# Altium PCB LS1C300B_176A_Msystem.PcbDoc (part 1 of 3)
Units mm, origin at the board's own origin, x right, y up, seen from the top; angles counter-clockwise.
Board outline 100.25 x 70.25 mm, 2 copper layers (Top Layer, Bottom Layer); 139 components, 183 nets, 683 pads, 164 vias.
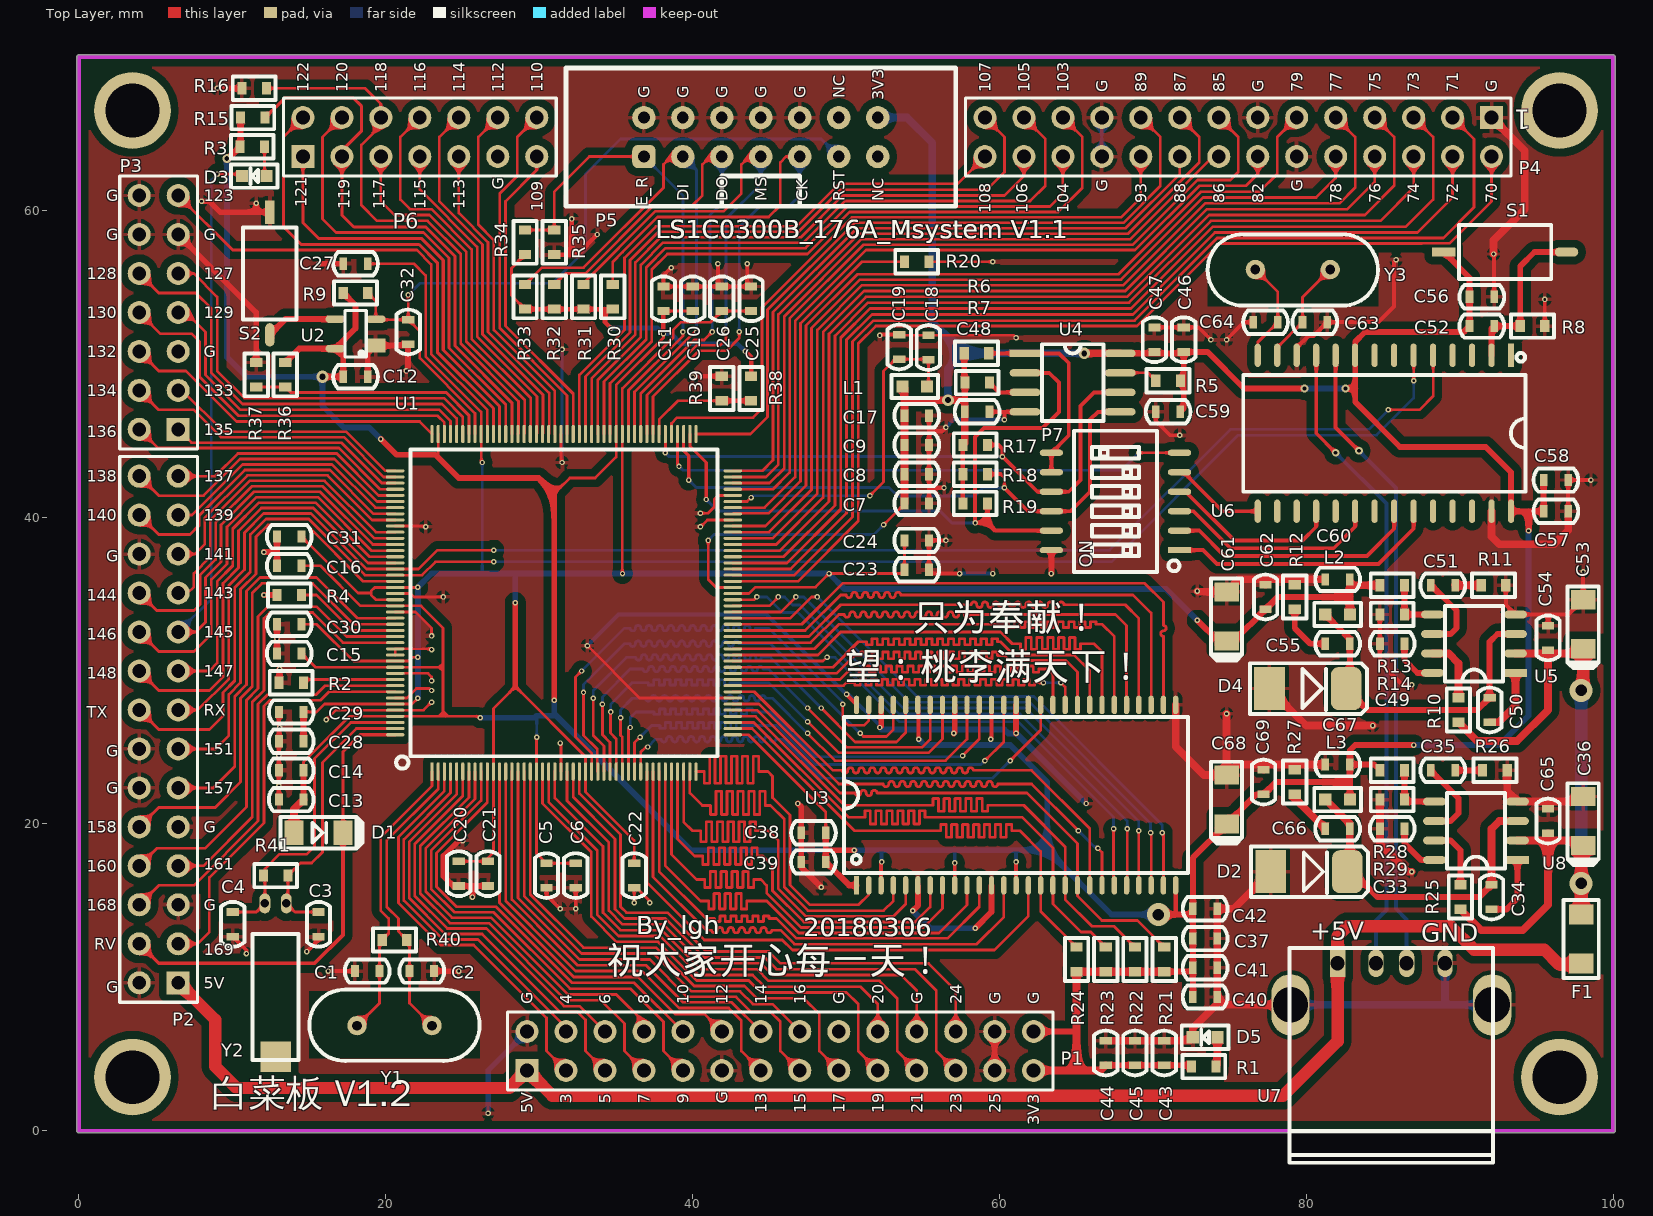
[diagram p0: Top Layer view]
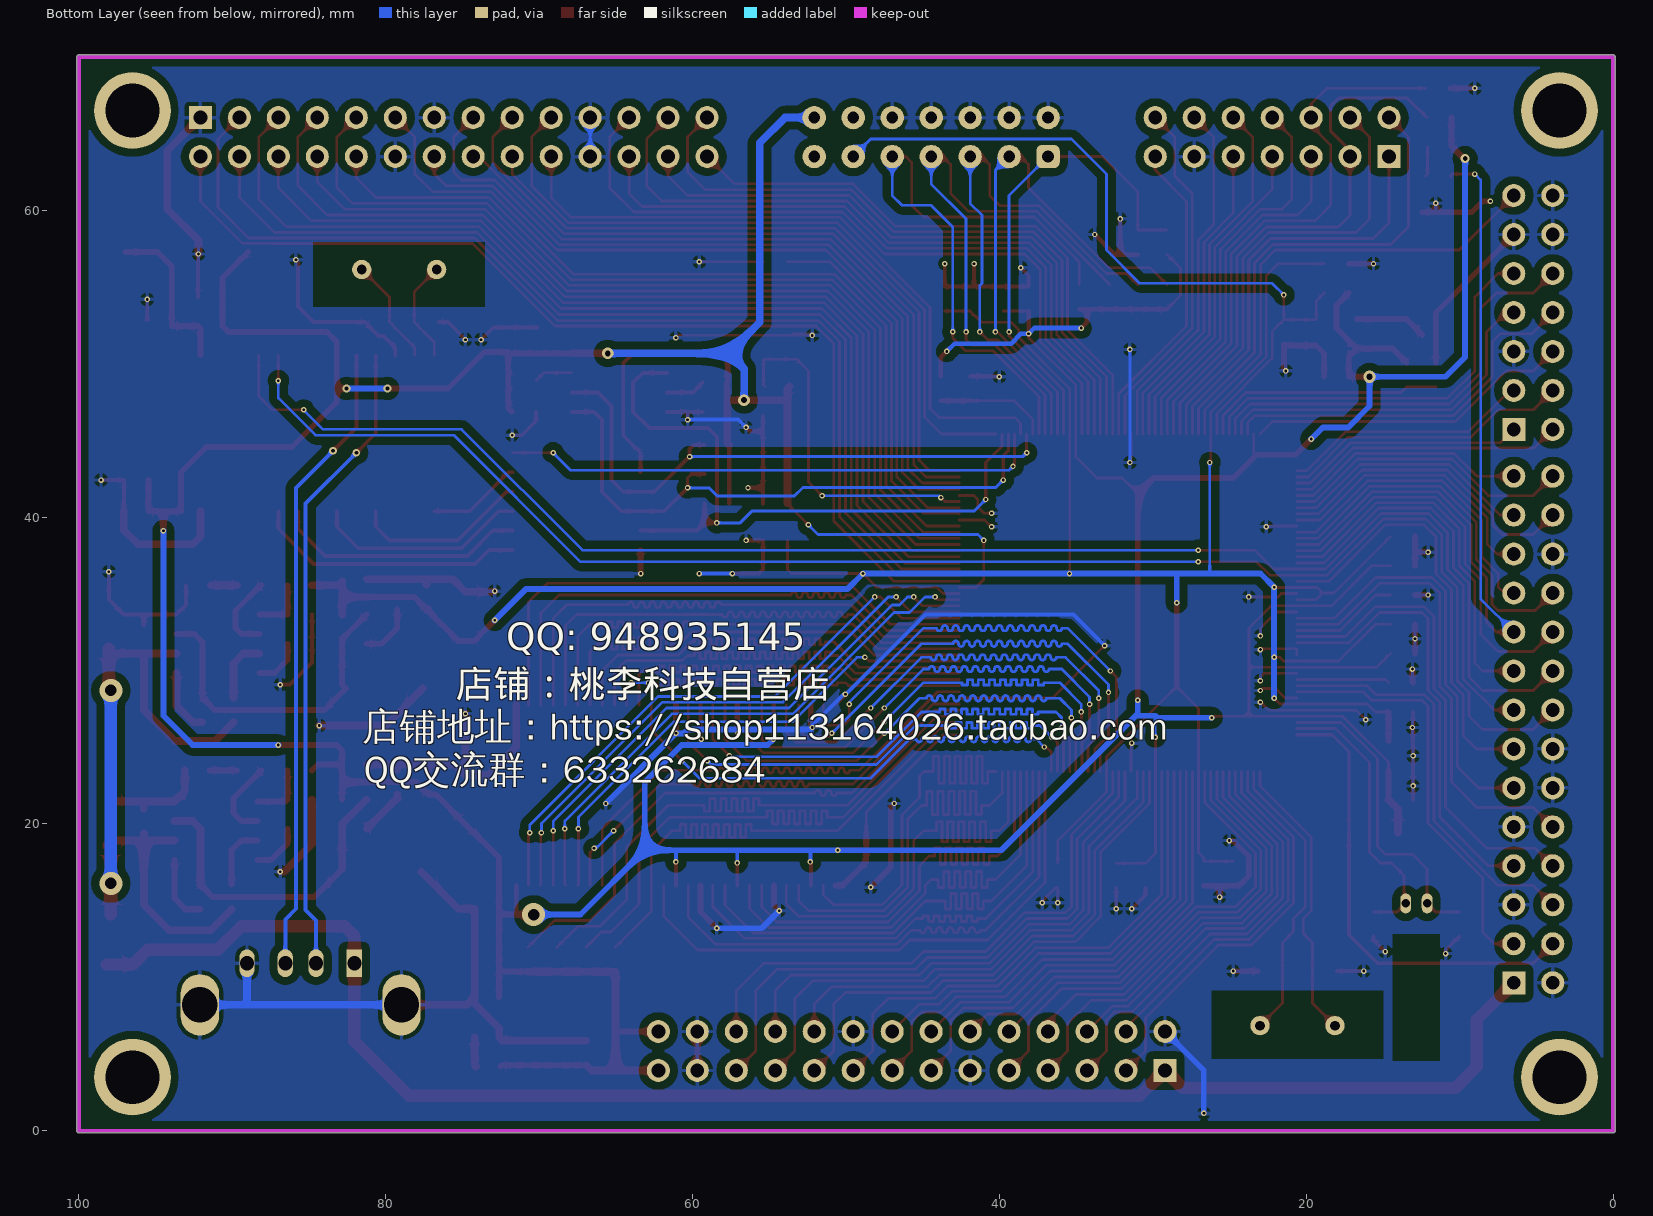
[diagram p1: Bottom Layer view, seen from below]

## Layer stack, top to bottom
Top Solder: solder mask 0.0102, Solder Resist, Dk 3.5
Top Layer: signal copper 0.0356
Dielectric 1: dielectric 0.32, FR-4, Dk 4.8
Bottom Layer: signal copper 0.0356
Bottom Solder: solder mask 0.0102, Solder Resist, Dk 3.5

## Board outline
-0.127,0 -0.127,69.85 cw(c0,69.85) -0.103,69.925 cw(c0,70) 0,70.127 100,70.127 cw(c100,70) 100.127,70 100.127,0 cw(c100,0) 100,-0.127 0,-0.127 cw(c0,0)

## Design rules (kind name [scope] priority, off if disabled: settings)
Clearance [All] p1: gap=0.508 ignorepadtopadclearanceinfootprint=FALSE except(0: Arc-Hole Track-Hole SMDPad-Hole THPad-Hole Via-Hole Fill-Hole Poly-Hole Region-Hole Text-Hole; 0.178: Arc-Arc Arc-Track Arc-SMDPad Track-Track Track-SMDPad SMDPad-SMDPad; 0.254: Arc-THPad Arc-Via Arc-Text Track-THPad Track-Via Track-Text SMDPad-THPad SMDPad-Via SMDPad-Text THPad-THPad THPad-Via THPad-Text Via-Via Via-Text Fill-Text Poly-Text Region-Text Text-Text)
HoleSize [All] p1: absolutevalues=TRUE maxlimit=3.81 minlimit=0.025 maxpercent=80.000 minpercent=20.000
Length [All] p1: maxlimit=2540 minlimit=0
Length SDRAM [All] p2: maxlimit=36.83 minlimit=34.29
MinimumSolderMaskSliver [All] p1: minsoldermaskwidth=0
PolygonConnect [All] p1: connectstyle=Relief reliefconductorwidth=0.254 reliefentries=4 polygonreliefangle="90 Angle" airgapwidth=0.254
RoutingVias [All] p1: holewidth=0.178 width=0.356 viastyle="Through Hole" minholewidth=0.178 minwidth=0.356 maxholewidth=0.711 maxwidth=1.27
SilkToSilkClearance [All] p1: silktosilkclearance=0
SilkToSolderMaskClearance [IsPad] p1: minsilkscreentomaskgap=0 clearancetoexposedcopper=TRUE
SolderMaskExpansion [All] p1: expansion=0.102
Width [All] p1: maxlimit=1.06 minlimit=0.152 preferedwidth=0.203
26 further rules are at their usual default settings.

## Components (designator, comment, footprint, x,y, rotation, side; value= is the part's Value field where it differs from the comment)
C1 "贴片电容" C0603 18.796,10.414 r0 top value=22pF
C2 "贴片电容" C0603 22.352,10.414 r180 top value=22pF
C3 "贴片电容" C0603 15.621,13.462 r90 top value=22pF
C4 "贴片电容" C0603 10.033,13.462 r90 top value=22pF
C5 "贴片电容" C0603 30.48,16.637 r90 top value=106
C6 "贴片电容" C0603 32.385,16.637 r90 top value=104
C7 "贴片电容" C0603 54.61,40.894 r180 top value=106
C8 "贴片电容" C0603 54.61,42.799 r180 top value=104
C9 "贴片电容" C0603 54.61,44.704 r180 top value=104
C10 "贴片电容" C0603 40.005,54.229 r270 top value=106
C11 "贴片电容" C0603 38.1,54.229 r270 top value=104
C12 "贴片电容" C0603 18.034,49.149 r180 top value=104
C13 "贴片电容" C0603 13.843,21.59 r0 top value=106
C14 "贴片电容" C0603 13.843,23.495 r0 top value=104
C15 "贴片电容" C0603 13.716,31.115 r0 top value=104
C16 "贴片电容" C0603 13.716,36.83 r0 top value=104
C17 "贴片电容" C0603 54.61,46.609 r180 top value=104
C18 "贴片电容" C0603 55.372,51.054 r270 top value=104
C19 "贴片电容" C0603 53.467,51.092 r270 top value=106
C20 "贴片电容" C0603 24.765,16.764 r90 top value=106
C21 "贴片电容" C0603 26.67,16.764 r90 top value=104
C22 "贴片电容" C0603 36.195,16.637 r90 top value=104
C23 "贴片电容" C0603 54.61,36.576 r180 top value=106
C24 "贴片电容" C0603 54.61,38.481 r180 top value=104
C25 "贴片电容" C0603 43.815,54.229 r270 top value=106
C26 "贴片电容" C0603 41.91,54.229 r270 top value=104
C27 "贴片电容" C0603 18.034,56.515 r0 top value=104
C28 "贴片电容" C0603 13.843,25.4 r0 top value=106
C29 "贴片电容" C0603 13.843,27.305 r0 top value=104
C30 "贴片电容" C0603 13.716,33.02 r0 top value=104
C31 "贴片电容" C0603 13.716,38.735 r0 top value=104
C32 "贴片电容" C0603 21.463,52.07 r90 top value=104
C33 "贴片电容" C0603 85.598,19.685 r180 top value=104
C34 "贴片电容" C0603 92.075,15.24 r90 top value=103
C35 "贴片电容" C0603 88.9,23.495 r180 top value="3.9nF 5%"
C36 "贴片钽电容" P-C1206 98.044,20.193 r90 top value=10uF/16V
C37 "贴片电容" C0603 73.406,12.535 r180 top value=106
C38 "贴片电容" C0603 47.879,19.431 r0 top value=104
C39 "贴片电容" C0603 47.879,17.526 r0 top value=104
C40 "贴片电容" C0603 73.406,8.725 r180 top value=104
C41 "贴片电容" C0603 73.406,10.63 r180 top value=104
C42 "贴片电容" C0603 73.406,14.478 r180 top value=104
C43 "贴片电容" C0603 70.739,5.08 r270 top value=104
C44 "贴片电容" C0603 66.929,5.08 r270 top value=104
C45 "贴片电容" C0603 68.834,5.08 r270 top value=104
C46 "贴片电容" C0603 72.009,51.562 r270 top value=106
C47 "贴片电容" C0603 70.104,51.562 r270 top value=104
C48 "贴片电容" C0603 58.547,46.863 r180 top value=104
C49 "贴片电容" C0603 85.598,31.75 r180 top value=104
C50 "贴片电容" C0603 91.948,27.432 r90 top value=103
C51 "贴片电容" C0603 88.9,35.56 r180 top value="3.9nF 5%"
C52 "贴片电容" C0603 91.44,52.451 r180 top value=104
C53 "贴片钽电容" P-C1206 98.044,33.02 r90 top value=10uF/16V
C54 "贴片电容" C0603 95.758,32.131 r270 top value=104
C55 "贴片电容" C0603 82.042,31.75 r0 top value=103
C56 "贴片电容" C0603 91.44,54.356 r180 top value=104
C57 "贴片电容" C0603 96.266,40.386 r180 top value=106
C58 "贴片电容" C0603 96.266,42.418 r180 top value=104
C59 "贴片电容" C0603 70.993,46.863 r0 top value=104
C60 "贴片电容" C0603 82.042,35.941 r180 top value=104
C61 "贴片钽电容" P-C1206 74.803,33.528 r90 top value=22uF/10V
C62 "贴片电容" C0603 77.343,34.798 r270 top value=104
C63 "贴片电容" C0603 80.556,52.705 r180 top value=22pF
C64 "贴片电容" C0603 77.343,52.705 r0 top value=22pF
C65 "贴片电容" C0603 95.758,20.193 r270 top value=104
C66 "贴片电容" C0603 82.042,19.685 r0 top value=103
C67 "贴片电容" C0603 82.042,23.876 r180 top value=104
C68 "贴片钽电容" P-C1206 74.803,21.59 r90 top value=22uF/10V
C69 "贴片电容" C0603 77.216,22.733 r270 top value=104
D1 "贴片二极管" LL-34 15.621,19.431 r0 top value=1NA4148
D2 "贴片二极管" DO-214AC 77.677,16.891 r0 top value=SS24
D3 "LED灯" LED-0603 11.43,62.23 r180 top value="绿色LED 0603"
D4 "贴片二极管" DO-214AC 77.597,28.829 r0 top value=SS24
D5 "LED灯" LED-0603 73.406,6.096 r180 top value="绿色LED 0603"
F1 "贴片保险丝" R1206 97.917,12.497 r270 top value=3A/5A
L1 "贴片电感" L0603 54.483,48.514 r0 top value=10uH
L2 "贴片电感" L0603 82.042,33.655 r180 top value=10uH
L3 "贴片电感" L0603 82.042,21.59 r180 top value=10uH
P1 "双排直针插针" HDR2X14 29.21,3.937 r0 top value=2*14P/2.54mm
P2 "双排直针插针" HDR2X14 6.477,9.652 r90 top value=2*14P/2.54mm
P3 "双排直针插针" HDR2X7 6.477,45.72 r90 top value=2*7P/2.54mm
P4 "双排直针插针" HDR2X14 92.075,66.04 r180 top value=2*14P/2.54mm
P5 "EJTAG接口14P" DC3-14P 44.45,64.77 r0 top value=DC3-14P/2*7p/2.54mm
P6 "双排直针插针" HDR2X7 14.605,63.5 r0 top value=2*7P/2.54mm
P7 "6P 拨动开关" DSHP06 67.564,41.021 r90 top value=DSHP06TSGET
R1 "贴片电阻" R0603 73.317,4.191 r180 top value="10K 1%"
R2 "贴片电阻" R0603 13.843,29.21 r0 top value="44.2R 1%"
R3 "贴片电阻" R0603 11.303,64.135 r180 top value="10K 1%"
R4 "贴片电阻" R0603 13.716,34.925 r0 top value="44.2R 1%"
R5 "贴片电阻" R0603 70.993,48.895 r180 top value="10K 1%"
R6 "贴片电阻" R0603 58.509,50.673 r0 top value="10K 1%"
R7 "贴片电阻" R0603 58.547,48.768 r0 top value="10K 1%"
R8 "贴片电阻" R0603 94.742,52.451 r0 top value="10K 1%"
R9 "贴片电阻" R0603 18.034,54.61 r180 top value="100K 5%"
R10 "贴片电阻" R0603 89.916,27.432 r90 top value="100K 5%"
R11 "贴片电阻" R0603 92.202,35.56 r180 top value="6.8K 1%"
R12 "贴片电阻" R0603 79.248,34.798 r90 top value="44.2K 1%"
R13 "贴片电阻" R0603 85.598,35.56 r180 top value="3.0K 1%"
R14 "贴片电阻" R0603 85.598,33.655 r0 top value="10K 1%"
R15 "贴片电阻" R0603 11.341,66.04 r0 top value="10K 1%"
R16 "贴片电阻" R0603 11.43,67.945 r0 top value="10K 1%"
R17 "贴片电阻" R0603 58.42,44.704 r180 top value="10K 1%"
R18 "贴片电阻" R0603 58.42,42.799 r180 top value="10K 1%"
R19 "贴片电阻" R0603 58.42,40.894 r180 top value="10K 1%"
R20 "贴片电阻" R0603 54.61,56.642 r180 top value="10K 1%"
R21 "贴片电阻" R0603 70.739,11.176 r90 top value="10K 1%"
R22 "贴片电阻" R0603 68.834,11.176 r90 top value="10K 1%"
R23 "贴片电阻" R0603 66.929,11.176 r90 top value="10K 1%"
R24 "贴片电阻" R0603 65.024,11.176 r90 top value="10K 1%"
R25 "贴片电阻" R0603 90.043,15.24 r90 top value="100K 5%"
R26 "贴片电阻" R0603 92.291,23.495 r180 top value="6.8K 1%"
R27 "贴片电阻" R0603 79.248,22.733 r90 top value="44.2K 1%"
R28 "贴片电阻" R0603 85.598,23.495 r180 top value="26.1K 1%"
R29 "贴片电阻" R0603 85.598,21.59 r0 top value="10K 1%"
R30 "贴片电阻" R0603 34.798,54.356 r270 top value="10K 1%"
R31 "贴片电阻" R0603 32.893,54.356 r270 top value="10K 1%"
R32 "贴片电阻" R0603 30.988,54.356 r270 top value="10K 1%"
R33 "贴片电阻" R0603 29.083,54.356 r270 top value="10K 1%"
R34 "贴片电阻" R0603 29.083,57.912 r270 top value="10K 1%"
R35 "贴片电阻" R0603 30.988,57.912 r270 top value="10K 1%"
R36 "贴片电阻" R0603 13.462,49.276 r90 top value="10K 1%"
R37 "贴片电阻" R0603 11.557,49.276 r90 top value="10K 1%"
R38 "贴片电阻" R0603 43.815,48.387 r90 top value="10K 1%"
R39 "贴片电阻" R0603 41.91,48.387 r90 top value="10K 1%"
R40 "贴片电阻" R0603 20.574,12.446 r180 top value="1M 5%"
R41 "贴片电阻" R0603 12.827,16.637 r0 top value="1M 5%"
S1 "贴片轻触按钮" "Touch button" 92.964,57.277 r0 top value=3.5*6*2.5mm
S2 "贴片轻触按钮" "Touch button" 12.446,55.88 r270 top value=3.5*6*2.5mm
U1 "LS1C300B_176A" QFP176 31.623,34.417 r0 top
U2 "复位延时芯片" SOT-143 18.034,51.943 r90 top value=MAX811
U3 "SDRAM" TSOP54 61.086,21.882 r0 top value=V54C3256164VHI6/IS42S16400-7T
U4 "NOR FLASH" SOIC-8-N 64.77,48.768 r270 top value=W25Q80
U5 "电源稳压芯片" SOIC-8 90.932,31.75 r90 top value=MP1482DS
U6 "通信芯片" SOP28 85.09,45.466 r180 top value=CH341A
U7 "USB座子" "USB-TYPE A" 85.542,10.922 r0 top value="USB-type A座子"
U8 "电源稳压芯片" SOIC-8 91.059,19.558 r90 top value=MP1482DS
Y1 "直插晶振" HC-49S 20.574,6.858 r0 top value=24MHz
Y2 "直插晶振" TC-38 12.827,14.826 r90 top value=32.768KHz
Y3 "直插晶振" HC-49S 79.121,56.134 r180 top value=12MHz

## Footprints (in the part's own frame and the unit in brackets; to place one, negate y for a bottom-side part, rotate by r counter-clockwise, add the part's x,y. Pads: shape width x height; smd on the part's side, far side on the other; paste and mask are expansions set on the pad)
C0603 [mm] "长1.6mm，宽0.8mm，高0.5mm"
  rect 0.5x0.8 smd: 1(-0.8,0) 2(0.8,0)
  silkscreen extent -1.46,-0.76 1.46,0.76, body extent -0.76,-0.38 0.76,0.38, height 0.5
DC3-14P [mil]
  rrect50% 60x60 hole 30: 1(-300,-50)
  round 60 hole 30: 2(-200,-50) 3(-100,-50) 4(0,-50) 5(100,-50) 6(200,-50) 7(300,-50) 8(300,50) 9(200,50) 10(100,50) 11(0,50) 12(-100,50) 13(-200,50) 14(-300,50)
  silkscreen extent -500,-177 500,177, body extent -500,-175 500,175, height 354
DO-214AC [mm] "长5.2mm，宽2.9mm，高2.4mm"
  rect 2x2.8 smd: 1(0,0)
  rrect50% 2x2.8 smd: 2(5,0)
  silkscreen extent -1.27,-1.65 6.35,1.65, body extent -0.13,-1.4 5.14,1.4, height 2.41
DSHP06 [mm] "BODY  9.22*5.4mm  引脚 9.22*8.35mm，脚间距1.27mm"
  rect 0.4x1.524 smd: 1(-3.175,-4.175)
  oval 0.4x1.524 smd: 2(-1.905,-4.175) 3(-0.635,-4.175) 4(0.635,-4.175) 5(1.905,-4.175) 6(3.175,-4.175) 7(3.175,4.175) 8(1.905,4.175) 9(0.635,4.175) 10(-0.635,4.175) 11(-1.905,4.175) 12(-3.175,4.175)
  silkscreen extent -4.61,-4.17 4.61,2.7, body extent -4.57,-2.67 4.57,2.67, height 2.3
HC-49S [mm] "高壳体积为10.5*4.5*3.5mm 矮壳体积10.5*5*.0*2.5mm"
  round 1.26 hole 0.63: 1(-2.44,0) 2(2.44,0)
  silkscreen extent -5.55,-2.3 5.55,2.35, body extent -5.6,-2.3 5.6,2.43, height 3.5
HDR2X7 [mm] "Connector; Header; 7x2 Position"
  rect 1.5x1.5 hole 0.9: 1(0,0)
  round 1.5 hole 0.9: 2(0,2.54) 3(2.54,0) 4(2.54,2.54) 5(5.08,0) 6(5.08,2.54) 7(7.62,0) 8(7.62,2.54) 9(10.16,0) 10(10.16,2.54) 11(12.7,0) 12(12.7,2.54) 13(15.24,0) 14(15.24,2.54)
  silkscreen extent -1.27,-1.27 16.51,3.81
HDR2X14 [mm] "Connector; Header; 14x2 Position"
  rect 1.5x1.5 hole 0.9: 1(0,0)
  round 1.5 hole 0.9: 2(0,2.54) 3(2.54,0) 4(2.54,2.54) 5(5.08,0) 6(5.08,2.54) 7(7.62,0) 8(7.62,2.54) 9(10.16,0) 10(10.16,2.54) 11(12.7,0) 12(12.7,2.54) 13(15.24,0) 14(15.24,2.54) 15(17.78,0) 16(17.78,2.54) 17(20.32,0) 18(20.32,2.54) 19(22.86,0) 20(22.86,2.54) 21(25.4,0) 22(25.4,2.54) 23(27.94,0) 24(27.94,2.54) 25(30.48,0) 26(30.48,2.54) 27(33.02,0) 28(33.02,2.54)
  silkscreen extent -1.27,-1.27 34.29,3.81
L0603 [mm] "长1.6mm，宽0.8mm，高0.5mm"
  rect 0.8x0.8 smd: 1(-0.8,0) 2(0.8,0)
  silkscreen extent -1.52,-0.76 1.52,0.76, body extent -0.76,-0.38 0.76,0.38, height 0.5
LED-0603 [mm] "长1.6mm，宽0.8mm，高0.5mm"
  rect 0.8x0.8 smd: 1(-0.8,0) 2(0.8,0)
  silkscreen extent -1.52,-0.76 1.52,0.76, body extent -0.76,-0.38 0.76,0.38, height 0.5
LL-34 [mm] "长3.4mm，宽1.35mm，高1.35mm"
  rect 1.25x1.6 smd: 1(-1.6,0) 2(1.6,0)
  silkscreen extent -2.46,-1.02 2.87,1.02, body extent -1.65,-0.7 1.65,0.7, height 1.39
P-C1206 [mm] "长3.2mm，宽1.6mm，高1.6mm"
  rect 1.25x1.6 smd: 1(-1.6,0) 2(1.6,0)
  silkscreen extent -2.87,-1.02 2.46,1.02, body extent -1.65,-0.76 1.65,0.76, height 2
QFP176 [mm] "body长宽20mm，引脚长宽22mm,脚间距0.4mm"
  rect 0.2x1.2 smd: 1(-8.6,-11)
  oval 0.2x1.2 smd: 2(-8.2,-11) 3(-7.8,-11) 4(-7.4,-11) 5(-7,-11) 6(-6.6,-11) 7(-6.2,-11) 8(-5.8,-11) 9(-5.4,-11) 10(-5,-11) 11(-4.6,-11) 12(-4.2,-11) 13(-3.8,-11) 14(-3.4,-11) 15(-3,-11) 16(-2.6,-11) 17(-2.2,-11) 18(-1.8,-11) 19(-1.4,-11) 20(-1,-11) 21(-0.6,-11) 22(-0.2,-11) 23(0.2,-11) 24(0.6,-11) 25(1,-11) 26(1.4,-11) 27(1.8,-11) 28(2.2,-11) 29(2.6,-11) 30(3,-11) 31(3.4,-11) 32(3.8,-11) 33(4.2,-11) 34(4.6,-11) 35(5,-11) 36(5.4,-11) 37(5.8,-11) 38(6.2,-11) 39(6.6,-11) 40(7,-11) 41(7.4,-11) 42(7.8,-11) 43(8.2,-11) 44(8.6,-11) 89(8.6,11) 90(8.2,11) 91(7.8,11) 92(7.4,11) 93(7,11) 94(6.6,11) 95(6.2,11) 96(5.8,11) 97(5.4,11) 98(5,11) 99(4.6,11) 100(4.2,11) 101(3.8,11) 102(3.4,11) 103(3,11) 104(2.6,11) 105(2.2,11) 106(1.8,11) 107(1.4,11) 108(1,11) 109(0.6,11) 110(0.2,11) 111(-0.2,11) 112(-0.6,11) 113(-1,11) 114(-1.4,11) 115(-1.8,11) 116(-2.2,11) 117(-2.6,11) 118(-3,11) 119(-3.4,11) 120(-3.8,11) 121(-4.2,11) 122(-4.6,11) 123(-5,11) 124(-5.4,11) 125(-5.8,11) 126(-6.2,11) 127(-6.6,11) 128(-7,11) 129(-7.4,11) 130(-7.8,11) 131(-8.2,11) 132(-8.6,11)
  oval 1.2x0.2 smd: 45(11,-8.6) 46(11,-8.2) 47(11,-7.8) 48(11,-7.4) 49(11,-7) 50(11,-6.6) 51(11,-6.2) 52(11,-5.8) 53(11,-5.4) 54(11,-5) 55(11,-4.6) 56(11,-4.2) 57(11,-3.8) 58(11,-3.4) 59(11,-3) 60(11,-2.6) 61(11,-2.2) 62(11,-1.8) 63(11,-1.4) 64(11,-1) 65(11,-0.6) 66(11,-0.2) 67(11,0.2) 68(11,0.6) 69(11,1) 70(11,1.4) 71(11,1.8) 72(11,2.2) 73(11,2.6) 74(11,3) 75(11,3.4) 76(11,3.8) 77(11,4.2) 78(11,4.6) 79(11,5) 80(11,5.4) 81(11,5.8) 82(11,6.2) 83(11,6.6) 84(11,7) 85(11,7.4) 86(11,7.8) 87(11,8.2) 88(11,8.6) 133(-11,8.6) 134(-11,8.2) 135(-11,7.8) 136(-11,7.4) 137(-11,7) 138(-11,6.6) 139(-11,6.2) 140(-11,5.8) 141(-11,5.4) 142(-11,5) 143(-11,4.6) 144(-11,4.2) 145(-11,3.8) 146(-11,3.4) 147(-11,3) 148(-11,2.6) 149(-11,2.2) 150(-11,1.8) 151(-11,1.4) 152(-11,1) 153(-11,0.6) 154(-11,0.2) 155(-11,-0.2) 156(-11,-0.6) 157(-11,-1) 158(-11,-1.4) 159(-11,-1.8) 160(-11,-2.2) 161(-11,-2.6) 162(-11,-3) 163(-11,-3.4) 164(-11,-3.8) 165(-11,-4.2) 166(-11,-4.6) 167(-11,-5) 168(-11,-5.4) 169(-11,-5.8) 170(-11,-6.2) 171(-11,-6.6) 172(-11,-7) 173(-11,-7.4) 174(-11,-7.8) 175(-11,-8.2) 176(-11,-8.6)
  silkscreen extent -10.94,-10.82 10,10, body extent -10.03,-10.03 10.03,10.03, height 1.6
R0603 [mm] "长1.6mm，宽0.8mm，高0.5mm"
  rect 0.6x0.8 smd: 1(-0.8,0) 2(0.8,0)
  silkscreen extent -1.4,-0.76 1.4,0.76, body extent -0.76,-0.38 0.76,0.38, height 0.5
R1206 [mm] "长3.2mm，宽1.6mm，高1mm"
  rect 1.3x1.6 smd: 1(-1.6,0) 2(1.6,0)
  silkscreen extent -2.54,-1.14 2.54,1.14, body extent -1.52,-0.76 1.65,0.76, height 1
SOIC-8 [mm] "长4.9mm,宽5.4mm,高2mm"
  rect 0.5x1.5 smd: 1(-1.905,-2.7)
  oval 0.5x1.5 smd: 2(-0.635,-2.7) 3(0.635,-2.7) 4(1.905,-2.7) 5(1.905,2.7) 6(0.635,2.7) 7(-0.635,2.7) 8(-1.905,2.7)
  silkscreen extent -2.45,-1.9 2.45,1.9, body extent -2.54,-2.79 2.54,2.67, height 2
SOIC-8-N [mm] "长5mm，宽6.2mm，高1.75mm，脚间距1.27mm"
  rect 0.48x2 smd: 1(-1.905,-3.1)
  oval 0.48x2 smd: 2(-0.635,-3.1) 3(0.635,-3.1) 4(1.905,-3.1) 5(1.905,3.1) 6(0.635,3.1) 7(-0.635,3.1) 8(-1.905,3.1)
  silkscreen extent -2.5,-2 2.5,2, body extent -2.54,-3.18 2.54,3.18, height 1.27
SOP28 [mm] "body  18.4*7.62mm,引脚 18.4*10.16mm，脚间距1.27mm"
  rect 0.4x1.524 smd: 1(-8.255,-5.08)
  oval 0.4x1.524 smd: 2(-6.985,-5.08) 3(-5.715,-5.08) 4(-4.445,-5.08) 5(-3.175,-5.08) 6(-1.905,-5.08) 7(-0.635,-5.08) 8(0.635,-5.08) 9(1.905,-5.08) 10(3.175,-5.08) 11(4.445,-5.08) 12(5.715,-5.08) 13(6.985,-5.08) 14(8.255,-5.08) 15(8.255,5.08) 16(6.985,5.08) 17(5.715,5.08) 18(4.445,5.08) 19(3.175,5.08) 20(1.905,5.08) 21(0.635,5.08) 22(-0.635,5.08) 23(-1.905,5.08) 24(-3.175,5.08) 25(-4.445,5.08) 26(-5.715,5.08) 27(-6.985,5.08) 28(-8.255,5.08)
  silkscreen extent -9.2,-5.24 9.2,3.81, body extent -9.14,-3.81 9.27,3.81, height 2.54
SOT-143 [mm] "长3.04mm，宽1.4mm，脚间距2.64*1.92mm"
  rect 0.89x1.27 smd: 1(-0.762,-1.32)
  oval 0.5x1.27 smd: 2(0.96,-1.32) 3(0.96,1.32) 4(-0.96,1.32)
  silkscreen extent -1.52,-0.7 1.52,0.7, body extent -1.52,-1.4 1.52,1.27, height 1.22
TC-38 [mm] "长度8.2mm，直径3mm，脚间距1.1mm（1.4mm）"
  oval 1.3x0.7 hole 0.55: 1(0,0.7) 2(0,-0.7)
  rect 2x2 smd: Shell(-10,0)
  silkscreen extent -10.2,-1.5 -2,1.5, body extent -10.16,-1.5 0,1.5, height 2.99
"Touch button" [mm] "3.5*6*2.5mm"
  rect 1.524x0.6 smd: 1(-4,0)
  oval 1.524x0.6 smd: 2(4,0)
  silkscreen extent -3,-1.75 3,1.75, body extent -3.05,-1.91 3.05,1.91, height 2.5
TSOP54 [mm] "body 长宽22.22mm*10.16mm，引脚长宽22.22mm*11.76mm，脚间距0.8mm"
  rect 0.35x1.2 smd: 1(-10.4,-5.88)
  oval 0.35x1.2 smd: 2(-9.6,-5.88) 3(-8.8,-5.88) 4(-8,-5.88) 5(-7.2,-5.88) 6(-6.4,-5.88) 7(-5.6,-5.88) 8(-4.8,-5.88) 9(-4,-5.88) 10(-3.2,-5.88) 11(-2.4,-5.88) 12(-1.6,-5.88) 13(-0.8,-5.88) 14(0,-5.88) 15(0.8,-5.88) 16(1.6,-5.88) 17(2.4,-5.88) 18(3.2,-5.88) 19(4,-5.88) 20(4.8,-5.88) 21(5.6,-5.88) 22(6.4,-5.88) 23(7.2,-5.88) 24(8,-5.88) 25(8.8,-5.88) 26(9.6,-5.88) 27(10.4,-5.88) 28(10.4,5.88) 29(9.6,5.88) 30(8.8,5.88) 31(8,5.88) 32(7.2,5.88) 33(6.4,5.88) 34(5.6,5.88) 35(4.8,5.88) 36(4,5.88) 37(3.2,5.88) 38(2.4,5.88) 39(1.6,5.88) 40(0.8,5.88) 41(0,5.88) 42(-0.8,5.88) 43(-1.6,5.88) 44(-2.4,5.88) 45(-3.2,5.88) 46(-4,5.88) 47(-4.8,5.88) 48(-5.6,5.88) 49(-6.4,5.88) 50(-7.2,5.88) 51(-8,5.88) 52(-8.8,5.88) 53(-9.6,5.88) 54(-10.4,5.88)
  silkscreen extent -11.21,-5.08 11.21,5.08, body extent -11.18,-5.08 11.18,5.08, height 1.2
"USB-TYPE A" [mm]
  rect 1x1.8 hole 0.92: 1(-3.5,0)
  oval 1x1.8 hole 0.92: 2(-1,0) 3(1,0) 4(3.5,0)
  oval 2.5x4 hole 2.3: 5(-6.57,-2.71) 6(6.57,-2.71)
  silkscreen extent -6.62,-13 6.62,1, body extent -6.82,-12.95 6.86,1.02, height 5.9

## Part data
C1 C2 C3 C4 C5 C6 C7 C8 C9 C10 C11 C12 C13 C14 C15 C16 C17 C18 C19 C20 C21 C22 C23 C24 C25 C26 C27 C28 C29 C30 C31 C32 C33 C34 C35 C37 C38 C39 C40 C41 C42 C43 C44 C45 C46 C47 C48 C49 C50 C51 C52 C54 C55 C56 C57 C58 C59 C60 C62 C63 C64 C65 C66 C67 C69: library part Cap, "Capacitor", LatestRevisionDate=17-Jul-2002, LatestRevisionNote="Re-released for DXP Platform.", PackageDescription="Radial Cap, Thru-Hole; 2 Leads; 0.3 in Pin Spacing", PackageReference=RAD-0.3, Published=8-Jun-2000, Publisher="Altium Limited"
C36 C53 C61 C68: library part "Cap Pol2", "Polarized Capacitor (Axial)", LatestRevisionDate=17-Jul-2002, LatestRevisionNote="Re-released for DXP Platform.", PackageDescription="Polarized Capacitor; 2 Leads", PackageReference=POLAR0.8, Published=8-Jun-2000, Publisher="Altium Limited"
D1: library part Diode, "Default Diode", Code_JEDEC=DO-214-AB, LatestRevisionDate=17-Jul-2002, LatestRevisionNote="Re-released for DXP Platform.", PackageDescription="DO-214-AB/SMC; 2 C-Bend Leads; Body 7.9 x 5.9 mm, inc. leads (LxW)", PackageReference=SMC, PackageVersion=Sep-1996, Published=8-Jun-2000, Publisher="Altium Limited"
D2 D4: library part 1N47xx
D3 D5: library part LED0, "Typical INFRARED GaAs LED", LatestRevisionDate=08-Jul-2005, LatestRevisionNote="Mech Layer 1 removed.", PackageDescription="LED; 2 Leads", PackageReference=LED-0, Published=8-Jun-2000, Publisher="Altium Limited"
F1: library part "Fuse 1", "Fuse", LatestRevisionDate=17-Jul-2002, LatestRevisionNote="Re-released for DXP Platform.", PackageDescription="Thru-Hole; 2 Leads", PackageReference=PIN-W2/E2.8, Published=8-Jun-2000, Publisher="Altium Limited"
L1 L2 L3: library part Inductor, "Inductor", Code_IEC=1005, Code_JEITA=0402, LatestRevisionDate=29-May-2009, LatestRevisionNote="IPC-7351 Footprint Added.", PackageDescription="Chip Inductor", PackageReference=0402-A, Published=8-Jun-2000, Publisher="Altium Limited"
P1 P2 P4: library part MHDR2X14, "Header, 14-Pin, Dual row", LatestRevisionDate=17-Jul-2002, LatestRevisionNote="Re-released for DXP Platform.", Publisher="Altium Limited"
P3 P6: library part MHDR2X7, "Header, 7-Pin, Dual row", LatestRevisionDate=17-Jul-2002, LatestRevisionNote="Re-released for DXP Platform.", Publisher="Altium Limited"
P5: library part EJTAG-14P
P7: library part DSHP06TSGET, "台湾KE 公司  DSHP06TSGET"
R1 R2 R3 R4 R5 R6 R7 R8 R9 R10 R11 R12 R13 R14 R15 R16 R17 R18 R19 R20 R21 R22 R23 R24 R25 R26 R27 R28 R29 R30 R31 R32 R33 R34 R35 R36 R37 R38 R39 R40 R41: library part Res1, "Resistor", LatestRevisionDate=17-Jul-2002, LatestRevisionNote="Re-released for DXP Platform.", PackageDescription="Axial Device, Thru-Hole; 2 Leads; 0.3 in Pin Spacing", PackageReference=AXIAL-0.3, Published=8-Jun-2000, Publisher="Altium Limited"
S1 S2: library part SW-PB, "Switch", LatestRevisionDate=17-Jul-2002, LatestRevisionNote="Re-released for DXP Platform.", PackageDescription="Switch; 2 Leads", PackageReference=SPST-2, Published=24-Mar-1999, Publisher="Altium Limited"
U1: "龙芯1C300B QFP176A"
U2: library part MAX811
U3: library part IS42S16400, "ISSI 公司SDRAM ， 166, 133, 100 MHz"
U4: library part W25Q80, "nor flash W25Q64....华邦"
U5 U8: library part MP1482, "电源稳压芯片MPS,2A，18V的同步整流降压转换器"
U6: library part CH341S_P, "USB to Print Port / Parallel"
U7: library part USB
Y1 Y2: library part XTAL, "Crystal Oscillator", LatestRevisionDate=17-Jul-2002, LatestRevisionNote="Re-released for DXP Platform.", PackageDescription="Crystal, Thru-Hole; 2 Leads; Body 3.1 x 8.2 mm (Dia.xH)", PackageReference=R38, Published=8-Jun-2000, Publisher="Altium Limited"
Y3: library part CRYSTAL, "Crystal"

## Free pads (board coordinates)
  round 5 hole 3.5: 0(3.5,3.5) 0(3.5,66.5) 0(96.5,3.5) 0(96.5,66.5)

## Via types
v1: diameter 0.356, hole 0.178, Top Layer to Bottom Layer, 153 vias
v2: diameter 0.508, hole 0.254, Top Layer to Bottom Layer, 4 vias
v3: diameter 1.5, hole 0.75, Top Layer to Bottom Layer, 3 vias
v4: diameter 0.762, hole 0.381, Top Layer to Bottom Layer, 2 vias
v5: diameter 0.6, hole 0.3, Top Layer to Bottom Layer, 1 vias
v6: diameter 0.8, hole 0.4, Top Layer to Bottom Layer, 1 vias

## Nets (pads, with @x,y where several pads share a name; then routed paths per layer and width w, separated by ;. In a path a pad name is that pad's centre, name@x,y a point inside that pad or via, vN(x,y) a via of type N, cw(c..) or ccw(c..) an arc to the next point about the centre after c; other vN are vias at no path point)
1V2: C20.2 C21.2 C22.2 C23.2 C24.2 C25.2 C26.2 C27.2 C28.2 C29.2 C30.2 C31.2 C60.1 C61.1 C62.2 L2.1 R13.2 U1.11 U1.26 U1.68 U1.101 U1.124 U1.152 U1.154 U1.164 U1.171 | length 202.7
  Top Layer w0.178: C30.2@14.516,33.02 15.494,33.02 17.897,30.617 U1.164@20.623,30.617 21.473,30.617 21.717,30.861 v1(22.098,30.861) ; C31.2@14.516,38.735 18.199,35.052 19.05,35.052 ; C29.2@14.643,27.305 15.494,27.305 16.006,27.817 U1.171@20.623,27.817 21.721,27.817 v1(22.098,28.194) ; C27.2@18.834,56.515 21.844,56.515 22.606,55.753 22.606,50.482 26.223,46.865 U1.124@26.223,45.417 26.223,43.627 v1(26.289,43.561) ; U1.154@20.623,34.617 19.358,34.617 19.05,34.925 19.05,35.052 ; v1(22.098,35.433) 22.082,35.417 U1.152@20.623,35.417 19.288,35.417 19.05,35.179 19.05,35.052 ; C20.2@24.765,17.564 C21.2@26.67,17.564 26.67,17.78 27.023,18.133 U1.11@27.023,23.417 27.023,27.531 28.448,28.956 33.023,24.381 U1.26@33.023,23.417 33.023,22.095 36.195,18.923 C22.2@36.195,17.437 ; v1(35.433,36.322) 35.423,36.332 U1.101@35.423,45.417 35.423,48.377 38.735,51.689 38.735,52.197 39.243,52.705 41.186,52.705 C26.2@41.91,53.429 C25.2@43.561,53.429 ; U1.68@42.623,35.017 43.679,35.017 44.095,35.433 48.006,35.433 v1(48.895,36.322) 53.556,36.322 C23.2@53.81,36.576 C24.2@53.81,38.481
  Top Layer w0.381: C28.2@14.643,25.4 C29.2@14.643,27.305 ; 28.448,28.956 v1(28.448,34.417) ; v1(72.898,33.274) 74.244,31.928 C61.1@74.803,31.928
  Top Layer w0.4: C61.1@74.803,31.928 75.273,31.928 C62.2@77.343,33.998 78.143,34.798 82.842,34.798 ; C62.2@77.216,33.998 C62.2@77.216,34.036
  Top Layer w0.5: L2.1@82.842,33.655 82.842,34.798 82.842,35.814 83.096,35.56 R13.2@84.798,35.56
  Bottom Layer w0.178: 26.289,36.322 v1(26.289,43.561)
  Bottom Layer w0.381: v1(22.098,28.194) v1(22.098,30.861) v1(22.098,35.433) 22.987,36.322 26.289,36.322 28.448,36.322 ; v1(28.448,34.417) 28.448,36.322 ; v1(72.898,33.274) 70.866,35.306 49.911,35.306 v1(48.895,36.322) v1(35.433,36.322) 28.448,36.322
3: P1.3 U1.3 | length 26.5
  Top Layer w0.178: U1.3@23.823,23.417 23.823,22.139 20.828,19.144 20.828,14.859 23.571,12.116 25.73,12.116 30.48,7.366 30.48,5.207 P1.3@31.75,3.937
3V3: C5.2 C6.2 C7.2 C8.2 C9.2 C10.2 C11.2 C12.2 C13.2 C14.2 C15.2 C16.2 C17.2 C37.2 C38.2 C39.2 C40.2 C41.2 C42.2 C43.2 C44.2 C45.2 C46.2 C47.2 C48.2 C52.2 C56.2 C57.2 C58.2 C59.2 C67.1 C68.1 C69.2 D1.1 L1.1 L3.1 P1.27 P1.28 P5.8 R1.2 R3.2 R5.1 R6.1 R7.1 R9.2 R15.1 R17.2 R18.2 R19.2 R21.1 R22.1 R23.1 R24.1 R28.2 R30.2 R31.2 R32.2 R33.2 R34.2 R36.2 R38.2 S1.1 U1.18 U1.45 U1.69 U1.102 U1.131 U1.155 U1.165 U1.173 U2.4 U3.1 U3.3 U3.9 U3.14 U3.27 U3.43 U3.49 U4.8 U6.9 U6.28 | length 470.3
  Top Layer w0.178: C15.2@14.516,31.115 15.414,30.217 U1.165@20.623,30.217 23.74,30.217 ; C16.2@14.516,36.83 15.748,36.83 18.361,34.217 U1.155@20.623,34.217 22.298,34.217 23.74,32.775 23.74,30.217 ; C14.2@14.643,23.495 14.643,24.036 17.624,27.017 U1.173@20.623,27.017 23.613,27.017 ; 23.423,43.887 U1.131@23.423,45.417 ; 23.622,27.017 23.876,27.017 ; v1(26.162,26.924) 26.069,27.017 23.876,27.017 ; v1(29.845,25.654) 29.823,25.632 U1.18@29.823,23.417 29.823,18.094 C5.2@30.48,17.437 C6.2@32.385,17.437 ; 30.988,41.529 32.004,42.545 33.655,42.545 35.023,43.913 U1.102@35.023,45.417 35.023,48.612 38.1,51.689 v1(38.1,51.943) ; C11.2@38.1,53.429 C10.2@39.751,53.429 ; v1(41.021,38.481) 41.021,35.941 41.545,35.417 U1.69@42.623,35.417 ; U1.45@42.623,25.817 43.652,25.817 48.679,20.79 C38.2@48.679,19.431 ; v1(52.451,39.497) 53.81,40.856 C7.2@53.81,40.894 ; 23.74,30.217 23.74,27.153 23.876,27.017
  Top Layer w0.2: R33.2@29.083,53.556 28.194,54.445 28.194,56.223 R34.2@29.083,57.112
  Top Layer w0.254: U3.3@52.286,16.002 52.286,17.488 v1(52.324,17.526) ; U3.49@54.686,27.762 54.737,27.711 v1(54.737,25.527) ; U3.9@57.086,16.002 v1(57.087,17.463) ; v1(59.436,25.527) 59.486,25.577 U3.43@59.486,27.762 ; U3.14@61.086,16.002 v1(61.087,17.526) v1(61.087,17.526)
  Top Layer w0.3: R33.2@29.083,53.556 R32.2@30.988,53.556 R31.2@32.893,53.556 34.29,53.556 ; v1(34.671,52.324) 34.29,52.705 34.29,53.556 ; R30.2@34.798,53.556 34.29,53.556 ; v1(38.1,51.943) C11.2@38.1,53.429 ; v1(43.434,50.8) 43.815,50.419 R38.2@43.815,49.187 ; R19.2@57.62,40.894 R18.2@57.62,42.799 R17.2@57.62,44.704 ; U3.27@71.486,16.002 71.486,14.112 71.501,14.097
  Top Layer w0.381: v5(9.652,63.373) 9.652,63.284 R3.2@10.503,64.135 10.541,64.173 R15.1@10.541,66.04 ; R36.2@13.462,50.076 14.369,50.983 U2.4@16.714,50.983 ; C13.2@14.643,21.59 C14.2@14.643,23.495 ; v6(15.875,49.149) C12.2@17.234,49.149 17.234,50.463 U2.4@16.714,50.983 ; R9.2@17.234,54.61 18.034,53.81 18.034,52.303 U2.4@16.714,50.983 ; v1(19.685,45.085) 20.701,44.069 23.241,44.069 23.423,43.887 24.765,42.545 29.972,42.545 30.988,41.529 v1(30.988,28.067) ; C38.2@48.679,19.431 C39.2@48.679,17.526 50.203,16.002 U3.1@50.686,16.002 ; 48.768,18.288 v1(50.546,18.288) ; 57.709,47.625 57.747,47.663 R7.1@57.747,48.768 57.709,48.806 R6.1@57.709,50.673 ; P1.28@62.23,6.477 65.024,6.477 ; C44.2@66.929,4.28 C45.2@68.834,4.28 C43.2@70.739,4.28 72.428,4.28 R1.2@72.517,4.191 ; U4.8@67.87,50.673 71.92,50.673 C46.2@72.009,50.762 ; R21.1@70.739,10.376 72.352,10.376 C41.2@72.606,10.63 ; C59.2@71.793,46.863 72.009,47.079 C46.2@72.009,50.762 ; v2(79.883,48.387) 75.946,48.387 73.571,50.762 C46.2@72.009,50.762 ; v2(82.55,48.387) 83.185,48.387 ; L3.1@82.842,21.59 82.842,22.733 C67.1@82.842,23.876 ; R28.2@84.798,23.495 84.417,23.876 C67.1@82.842,23.876 ; v1(86.995,25.146) 83.185,25.146 82.842,24.803 C67.1@82.842,23.876 ; S1.1@88.964,57.277 90.64,55.601 C56.2@90.64,54.356 C52.2@90.64,52.451 90.259,52.07 83.82,52.07 83.185,51.435 U6.9@83.185,50.546 83.185,48.387 ; v1(94.488,39.116) 94.488,40.386 ; C58.2@95.466,42.418 C57.2@95.466,40.386 94.488,40.386 ; 83.185,48.387 83.185,47.498 86.106,44.577 91.694,44.577 93.345,42.926 U6.28@93.345,40.386 94.488,40.386
  Top Layer w0.4: v3@70.739,14.478 v3(70.358,14.097) 71.501,14.097 72.479,14.097 72.606,13.97 ; C40.2@72.606,8.725 C41.2@72.606,10.63 C37.2@72.606,12.535 72.606,13.97 ; 82.842,22.733 78.016,22.733 C69.2@77.216,21.933 76.746,21.933 C68.1@74.803,19.99 72.606,17.793 C42.2@72.606,14.478 72.606,13.97
  Top Layer w0.5: D1.1@14.021,19.431 14.021,20.968 C13.2@14.643,21.59 ; L1.1@53.683,48.514 53.81,48.387 53.81,47.625 ; C7.2@53.81,40.894 C8.2@53.81,42.799 C9.2@53.81,44.704 C17.2@53.81,46.609 53.81,47.625 ; R17.2@57.62,44.704 57.747,44.831 C48.2@57.747,46.863 57.747,47.663 ; 57.709,47.625 v4(56.642,47.625) 53.81,47.625 ; P1.27@62.23,3.937 65.024,3.937 ; v4(65.532,50.673) U4.8@67.87,50.673 ; C44.2@66.929,4.28 66.586,3.937 65.024,3.937 ; R21.1@70.739,10.376 R22.1@68.834,10.376 R23.1@66.929,10.376 R24.1@65.024,10.376 65.024,6.477 65.024,3.937
  Bottom Layer w0.178: v1(29.845,25.654) 29.845,27.051 ; v1(41.021,38.481) 41.402,38.862 51.816,38.862 v1(52.451,39.497)
  Bottom Layer w0.254: v1(52.324,17.526) 52.324,18.161 52.451,18.288 ; 57.023,18.288 57.087,18.224 v1(57.087,17.463) ; 59.436,25.146 v1(59.436,25.527) ; v1(61.087,17.526) 61.087,18.161 61.214,18.288
  Bottom Layer w0.3: v1(34.671,52.324) 37.719,52.324 v1(38.1,51.943) 38.608,51.943 39.243,51.308 42.926,51.308 v1(43.434,50.8)
  Bottom Layer w0.381: v5(9.652,63.373) 9.652,50.419 10.922,49.149 v6(15.875,49.149) 15.875,47.244 17.272,45.847 18.923,45.847 v1(19.685,45.085) ; v1(26.162,26.924) 29.718,26.924 29.845,27.051 31.115,27.051 ; v1(30.988,28.067) 30.988,27.178 31.115,27.051 ; v1(54.737,25.527) 55.118,25.146 59.436,25.146 60.706,25.146 63.119,22.733 63.119,18.288 ; v3(70.358,14.097) 67.31,14.097 63.119,18.288 ; v2(79.883,48.387) v2(82.55,48.387) ; v1(86.995,25.146) 92.583,25.146 94.488,27.051 v1(94.488,39.116) ; 31.115,27.051 39.878,18.288 v1(50.546,18.288) 52.451,18.288 57.023,18.288 61.214,18.288 63.119,18.288
  Bottom Layer w0.5: P5.8@52.07,66.04 53.975,66.04 55.626,64.389 55.626,52.705 57.658,50.673 ; v4(56.642,47.625) 56.642,49.657 57.658,50.673 ; v4(65.532,50.673) 57.658,50.673
4: P1.4 U1.4 | length 23.9
  Top Layer w0.178: U1.4@24.223,23.417 24.223,22.036 21.184,18.997 21.184,15.011 23.724,12.471 26.01,12.471 31.75,6.731 P1.4@31.75,6.477
5: P1.5 U1.5 | length 28.1
  Top Layer w0.178: U1.5@24.623,23.417 24.623,21.933 21.539,18.849 21.539,15.159 23.871,12.827 26.289,12.827 31.369,7.747 32.512,7.747 33.02,7.239 33.02,5.207 P1.5@34.29,3.937
5V: C36.1 C53.1 C54.2 C65.2 F1.1 R10.1 R25.1 U5.2 U8.2 | length 51.4
  Top Layer w0.508: R10.1@89.916,26.632 91.148,25.4 93.726,25.4 95.758,27.432 C54.2@95.758,31.115 ; R25.1@90.043,14.44 91.402,13.081 94.107,13.081 95.758,14.732 95.758,18.923 ; U5.2@93.632,31.115 C54.2@95.758,31.115 ; U8.2@93.759,18.923 95.758,18.923 ; C65.2@95.758,19.393 95.758,18.923 ; C36.1@98.044,18.593 97.714,18.923 95.758,18.923 ; C53.1@98.044,31.42 97.739,31.115 C54.2@95.758,31.115
  Top Layer w0.8: F1.1@97.917,14.097 v3(97.917,16.129) 97.917,18.466 C36.1@98.044,18.593 ; v3(97.917,28.702) 98.044,28.829 C53.1@98.044,31.42
  Bottom Layer w0.8: v3(97.917,16.129) v3(97.917,28.702)
5V1: F1.2 P1.1 P2.1 U7.1 | length 107.1
  Top Layer w0.8: P2.1@6.477,9.652 8.89,7.239 8.89,4.191 10.287,2.794 28.067,2.794 P1.1@29.21,3.937 30.861,2.286 78.486,2.286 82.042,5.842 U7.1@82.042,10.922 82.042,12.7 82.677,13.335 89.408,13.335 90.932,11.811 95.504,11.811 96.469,10.846 F1.2@98.171,10.846
6: P1.6 U1.6 | length 25.5
  Top Layer w0.178: U1.6@25.023,23.417 25.023,21.83 21.895,18.702 21.895,15.306 24.018,13.183 26.568,13.183 31.623,8.128 32.639,8.128 P1.6@34.29,6.477
7: P1.7 U1.7 | length 29.7
  Top Layer w0.178: U1.7@25.423,23.417 25.423,21.727 22.25,18.555 22.25,15.469 24.181,13.538 26.726,13.538 31.755,8.509 34.036,8.509 35.56,6.985 35.56,5.207 P1.7@36.83,3.937
8: P1.8 U1.8 | length 27.5
  Top Layer w0.178: U1.8@25.823,23.417 25.823,21.625 22.606,18.408 22.606,15.616 24.328,13.894 26.873,13.894 31.877,8.89 35.027,8.89 36.83,7.087 P1.8@36.83,6.477
9: P1.9 U1.9 | length 31.4
  Top Layer w0.178: U1.9@26.223,23.417 26.223,21.522 22.962,18.26 22.962,15.763 24.475,14.249 27.026,14.249 32.004,9.271 35.941,9.271 38.1,7.112 38.1,5.207 P1.9@39.37,3.937
10: P1.10 U1.10 | length 28.8
  Top Layer w0.178: U1.10@26.623,23.417 26.623,21.419 23.317,18.113 23.317,15.91 24.623,14.605 27.183,14.605 32.136,9.652 36.195,9.652 P1.10@39.37,6.477
12: P1.12 U1.12 | length 26.5
  Top Layer w0.178: U1.12@27.423,23.417 27.423,14.868 32.258,10.033 36.449,10.033 38.862,7.62 40.767,7.62 P1.12@41.91,6.477
13: P1.13 U1.13 | length 30.8
  Top Layer w0.178: U1.13@27.823,23.417 27.823,14.971 31.242,11.552 32.38,10.414 36.703,10.414 39.116,8.001 42.355,8.001 43.18,7.175 43.18,5.207 P1.13@44.45,3.937
14: P1.14 U1.14 | length 28.1
  Top Layer w0.178: U1.14@28.223,23.417 28.223,15.074 31.491,11.806 32.502,10.795 36.957,10.795 39.37,8.382 42.545,8.382 P1.14@44.45,6.477
15: P1.15 U1.15 | length 32.4
  Top Layer w0.178: U1.15@28.623,23.417 28.623,15.177 32.497,11.303 32.631,11.168 37.219,11.168 39.649,8.738 42.824,8.738 43.815,7.747 45.085,7.747 45.72,7.112 45.72,5.207 P1.15@46.99,3.937
16: P1.16 U1.16 | length 29.7
  Top Layer w0.178: U1.16@29.023,23.417 29.023,15.3 32.766,11.557 37.465,11.557 39.929,9.093 43.104,9.093 43.942,8.255 45.212,8.255 P1.16@46.99,6.477
17: P1.17 U1.17 | length 34.3
  Top Layer w0.178: U1.17@29.423,23.417 29.423,15.408 32.893,11.938 37.623,11.938 40.112,9.449 43.383,9.449 44.196,8.636 47.244,8.636 48.26,7.62 48.26,5.207 P1.17@49.53,3.937
19: P1.19 U1.19 | length 35.4
  Top Layer w0.178: U1.19@30.223,23.417 30.223,21.339 33.401,18.161 33.401,13.965 35.047,12.319 37.745,12.319 40.259,9.804 43.663,9.804 44.45,9.017 50.038,9.017 50.8,8.255 50.8,5.207 P1.19@52.07,3.937
20: P1.20 U1.20 | length 33.1
  Top Layer w0.178: U1.20@30.623,23.417 30.623,21.447 33.782,18.288 33.782,14.097 35.179,12.7 37.866,12.7 40.406,10.16 43.917,10.16 44.679,9.398 50.927,9.398 52.07,8.255 P1.20@52.07,6.477
21: P1.21 U1.21 | length 37.2
  Top Layer w0.178: U1.21@31.023,23.417 31.023,21.682 34.163,18.542 34.163,14.224 35.306,13.081 37.988,13.081 40.528,10.541 44.196,10.541 44.958,9.779 52.197,9.779 53.34,8.636 53.34,5.207 P1.21@54.61,3.937
23: P1.22 U1.23 | length 35.1
  Top Layer w0.178: U1.23@31.823,23.417 31.823,21.517 34.544,18.796 34.544,14.351 35.433,13.462 38.11,13.462 40.65,10.922 44.45,10.922 45.212,10.16 53.594,10.16 54.61,9.144 P1.22@54.61,6.477
24: P1.23 U1.24 | length 39
  Top Layer w0.178: U1.24@32.223,23.417 32.223,21.752 34.95,19.025 34.95,14.453 35.56,13.843 38.232,13.843 40.772,11.303 44.704,11.303 45.466,10.541 54.483,10.541 55.88,9.144 55.88,5.207 P1.23@57.15,3.937
25: P1.24 U1.25 | length 36.7
  Top Layer w0.178: U1.25@32.623,23.417 32.623,21.987 35.306,19.304 35.306,14.605 35.687,14.224 38.354,14.224 40.894,11.684 44.958,11.684 45.72,10.922 55.372,10.922 57.15,9.144 P1.24@57.15,6.477
70: P4.2 U1.70 | length 69.4
  Top Layer w0.178: U1.70@42.623,35.817 46.866,35.817 50.8,39.751 50.8,51.308 51.943,52.451 68.961,52.451 74.346,57.836 87.544,57.836 87.551,57.844 89.34,57.844 92.075,60.579 P4.2@92.075,63.5
71: P4.3 U1.71 | length 71.4
  Top Layer w0.178: U1.71@42.623,36.217 46.631,36.217 50.419,40.005 50.419,51.435 51.791,52.807 68.809,52.807 74.193,58.191 87.396,58.191 87.404,58.199 88.933,58.199 90.932,60.198 90.932,64.643 P4.3@89.535,66.04
72: P4.4 U1.72 | length 66.2
  Top Layer w0.178: U1.72@42.623,36.617 46.396,36.617 50.038,40.259 50.038,51.562 51.689,53.213 68.707,53.213 74.041,58.547 87.249,58.547 89.535,60.833 P4.4@89.535,63.5
73: P4.5 U1.73 | length 67.9
  Top Layer w0.178: U1.73@42.623,37.017 46.161,37.017 49.657,40.513 49.657,51.689 51.562,53.594 68.58,53.594 73.914,58.928 86.487,58.928 88.265,60.706 88.265,64.77 P4.5@86.995,66.04
74: P4.6 U1.74 | length 62.8
  Top Layer w0.178: U1.74@42.623,37.417 45.926,37.417 49.276,40.767 49.276,51.816 51.435,53.975 68.453,53.975 73.787,59.309 84.836,59.309 86.995,61.468 P4.6@86.995,63.5
75: P4.7 U1.75 | length 64.3
  Top Layer w0.178: U1.75@42.623,37.817 45.691,37.817 48.895,41.021 48.895,51.943 51.308,54.356 68.326,54.356 73.66,59.69 83.82,59.69 85.725,61.595 85.725,64.77 P4.7@84.455,66.04
76: P4.8 U1.76 | length 59.6
  Top Layer w0.178: U1.76@42.623,38.217 45.456,38.217 48.514,41.275 48.514,52.07 51.181,54.737 68.199,54.737 73.533,60.071 82.677,60.071 84.455,61.849 P4.8@84.455,63.5
77: P4.9 U1.77 | length 61.4
  Top Layer w0.178: U1.77@42.623,38.617 45.221,38.617 48.133,41.529 48.133,52.197 51.054,55.118 68.072,55.118 73.406,60.452 82.169,60.452 83.185,61.468 83.185,64.77 P4.9@81.915,66.04
78: P4.10 U1.78 | length 56.4
  Top Layer w0.178: U1.78@42.623,39.017 44.986,39.017 47.752,41.783 47.752,52.324 50.902,55.474 67.92,55.474 73.279,60.833 80.645,60.833 81.915,62.103 P4.10@81.915,63.5
79: P4.11 U1.79 | length 55.3
  Top Layer w0.178: U1.79@42.623,39.417 44.751,39.417 47.396,42.062 47.396,52.476 50.749,55.829 67.767,55.829 73.152,61.214 76.962,61.214 78.105,62.357 78.105,64.77 P4.11@79.375,66.04
82: P4.14 U1.82 | length 50.3
  Top Layer w0.178: U1.82@42.623,40.617 44.681,40.617 46.685,42.621 46.685,52.781 51.308,57.404 68.839,57.404 73.03,61.595 76.073,61.595 76.835,62.357 P4.14@76.835,63.5
85: P4.15 U1.85 | length 51.5
  Top Layer w0.178: U1.85@42.623,41.817 45.246,41.817 46.33,42.901 46.33,52.934 51.156,57.76 68.692,57.76 72.908,61.976 75.057,61.976 75.565,62.484 75.565,64.77 P4.15@74.295,66.04
86: P4.16 U1.86 | length 46.3
  Top Layer w0.178: U1.86@42.623,42.217 45.011,42.217 45.974,43.18 45.974,53.081 51.008,58.115 68.529,58.115 73.914,63.5 P4.16@74.295,63.5